# Altium PCB PCB.PcbDoc
Units mm, origin at the board's own origin, x right, y up, seen from the top; angles counter-clockwise.
Board outline 43.56 x 29.46 mm, 2 copper layers (Top Layer, Bottom Layer), stack 1.67 mm thick; 31 components, 26 nets, 139 pads, 0 vias.
Unrouted connection lines stored in the file: 86.
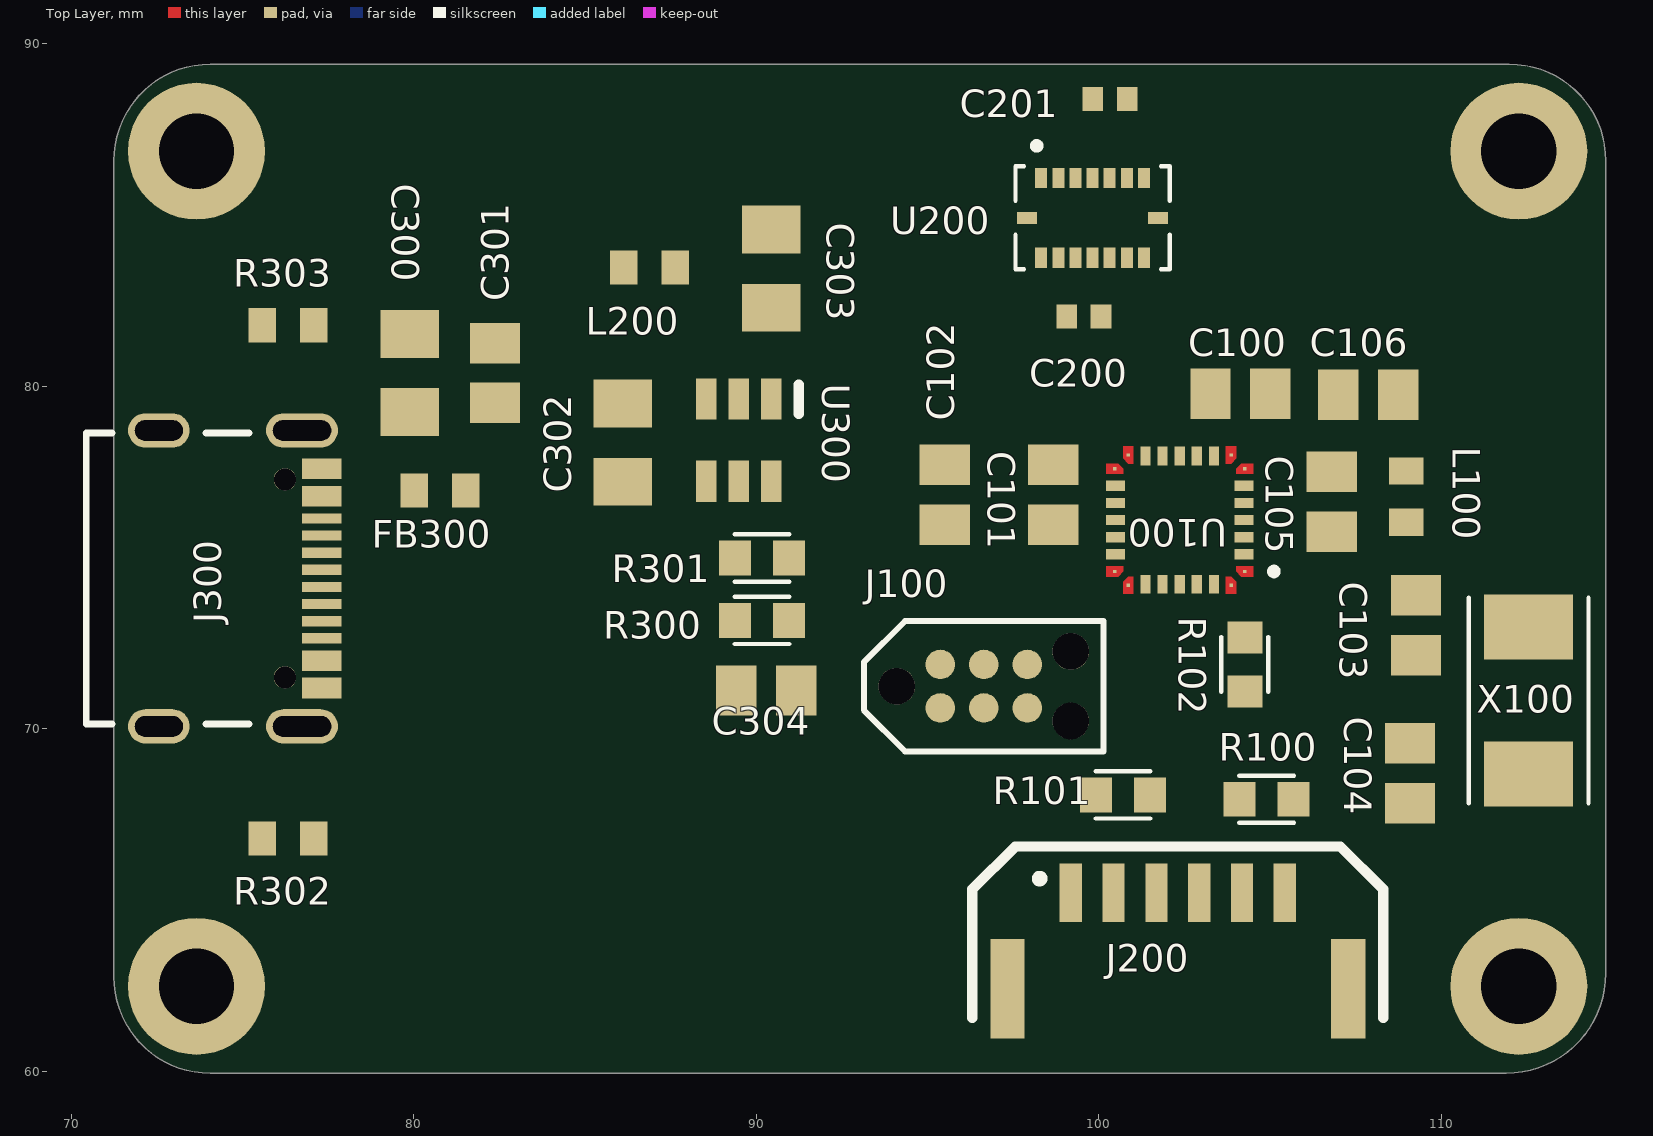
[diagram p0: Top Layer view]
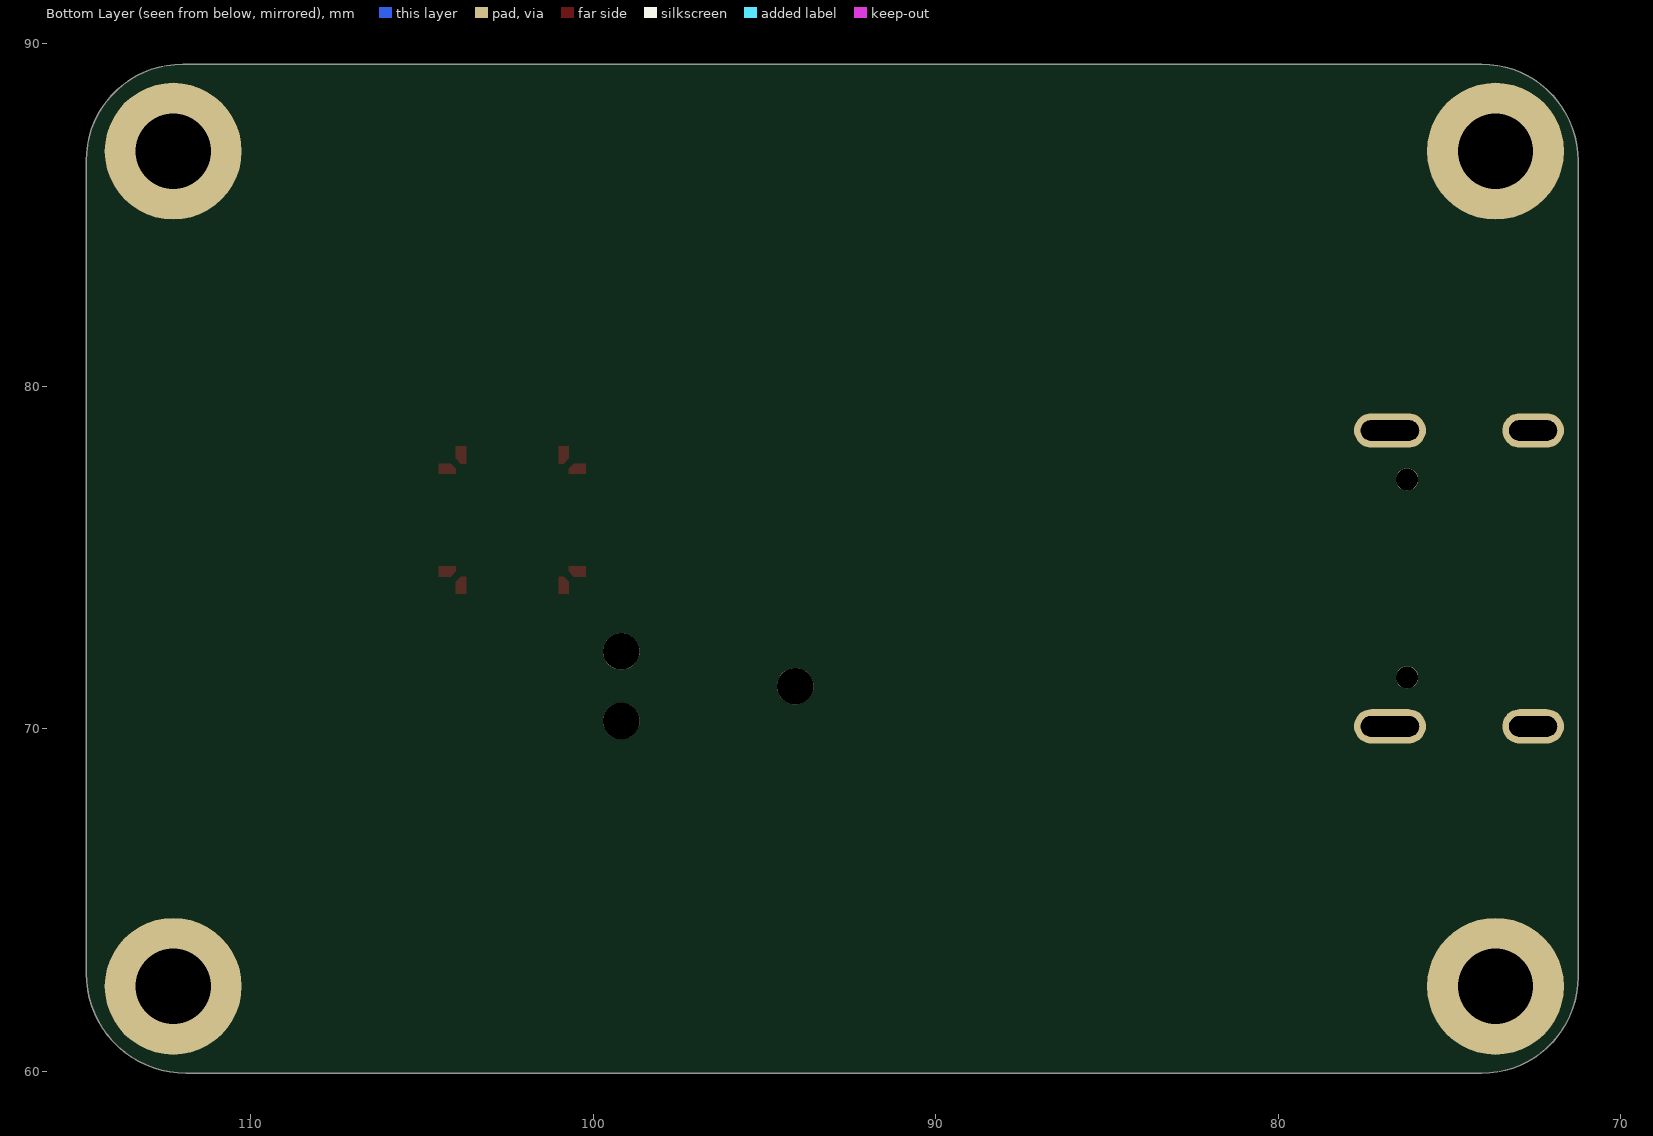
[diagram p1: Bottom Layer view, seen from below]

## Layer stack, top to bottom
Top Solder: solder mask 0.0254, Solder Resist, Dk 3.5
Top Layer: signal copper 0.035
Dielectric 1: dielectric 1.6, FR-4, Dk 4.6
Bottom Layer: signal copper 0.035
Bottom Solder: solder mask 0.0254, Solder Resist, Dk 3.5

## Board outline
71.247,62.759 ccw(c74.062,62.759) 74.062,59.944 111.894,59.944 ccw(c111.894,62.858) 114.808,62.858 114.808,86.593 ccw(c111.993,86.593) 111.993,89.408 74.062,89.408 ccw(c74.062,86.593) 71.247,86.593

## Design rules (kind name [scope] priority, off if disabled: settings)
Clearance [All] p1: gap=0.2 ignorepadtopadclearanceinfootprint=FALSE except(0: Arc-Hole Track-Hole SMDPad-Hole THPad-Hole Via-Hole Fill-Hole Poly-Hole Region-Hole Text-Hole; 0.15: Arc-Arc Arc-Track Arc-SMDPad Track-Track Track-SMDPad SMDPad-SMDPad; 0.3: Arc-THPad Track-THPad SMDPad-THPad THPad-THPad)
DiffPairsRouting [InDifferentialPairClass('USB')] p1: maxlimit=0.12 minlimit=0.12 mostfreqgap=0.12 toplayer_minwidth=0.351 toplayer_maxwidth=0.351 toplayer_prefwidth=0.351 bottomlayer_minwidth=0.351 bottomlayer_maxwidth=0.351 bottomlayer_prefwidth=0.351 impedanceprofiledriven=TRUE impedanceprofileid={9CCACE5A-470D-439F-A7A8-89F48AE89AC6} impedanceprofilevalue=90.000000 maxuncoupledlength=12.7
PolygonConnect [All] p1: thpad.connectstyle=Relief thpad.reliefconductorwidth=0.254 thpad.reliefentries=4 thpad.polygonreliefangle="90 Angle" thpad.airgapwidth=0.254 smdpad.connectstyle=Relief smdpad.reliefconductorwidth=0.254 smdpad.reliefentries=4 smdpad.polygonreliefangle="90 Angle" smdpad.airgapwidth=0.254 via.connectstyle=Direct via.reliefconductorwidth=0.254 via.reliefentries=4 via.polygonreliefangle="90 Angle" via.airgapwidth=0.254
RoutingVias [All] p1: holewidth=0.3 width=0.7 viastyle="Through Hole" minholewidth=0.25 minwidth=0.6 maxholewidth=0.3 maxwidth=0.7
SolderMaskExpansion [All] p1: expansion=0.102 istentingtop=FALSE
UnRoutedNet [All] p1: checkbadconnections=TRUE
Width [All] p1: maxlimit=1 minlimit=0.15 preferedwidth=0.254
28 further rules are at their usual default settings.

## Classes and differential pairs
differential pair class USB: USB_D
differential pair USB_D: +USB_D_P -USB_D_N

## Components (designator, comment, footprint, x,y, rotation, side; value= is the part's Value field where it differs from the comment)
C100 "100n" CAP-0805-NP0 104.14,79.784 r0 top
C101 "100n" CAP-0805-NP0 98.679,76.835 r90 top
C102 "100n" CAP-0805-NP0 95.504,76.835 r90 top
C103 "10p" CAP-0805-NP0 109.265,73.025 r270 top
C104 "10p" CAP-0805-NP0 109.093,68.707 r90 top
C105 "100n" CAP-0805-NP0 106.807,76.629 r270 top
C106 "100n" CAP-0805-NP0 107.87,79.756 r180 top
C200 "100n" CAP_0402 99.568,82.042 r180 top
C201 "100n" CAP_0402 100.33,88.392 r0 top
C300 "100n" CAP_0805 79.883,80.391 r90 top
C301 "4u7" CAP-0805-NP0 82.376,80.391 r270 top
C302 "100n" CAP_0805 86.106,78.359 r90 top
C303 "4u7" CAP_0805 90.444,83.439 r270 top
C304 "22p" CAP-0805-NP0 90.297,71.12 r0 top
FB300 "120R" FB_0603 80.772,76.962 r0 top
J100 "TC2030-NL" TC2030-NL-FP 96.647,71.247 r0 top
J200 "SM06B-GHS-TB" SM06B_GHS_TB 102.312,63.815 r0 top
J300 "USB4105-GF-A-060" USB4105-GF-A-060 74.75,75.184 r270 top
L100 "Inductor" IND_0603 108.89,76.632 r270 top
L200 "Inductor" IND_0603 86.741,83.566 r180 top
R100 "5k1" RES-0603 104.902,67.945 r0 top
R101 "5k1" RES-0603 100.711,68.072 r180 top
R102 "5k1" RES-0603 104.267,71.882 r90 top
R300 "887k" RES-0603 90.17,73.167 r0 top
R301 "280k" RES-0603 90.17,74.992 r180 top
R302 "5k1" RES_0603 76.327,66.802 r180 top
R303 "5k1" RES_0603 76.327,81.788 r180 top
U100 "STM32F042G6U6" STM32F042G6U6 102.366,76.096 r180 top
U200 "BMI088" BMI088 99.822,84.923 r0 top
U300 "LTC" SOT-23-6 89.491,78.431 r180 top
X100 "24MHZ" ABM7-8MHZ 112.442,70.866 r270 top

## Footprints (in the part's own frame and the unit in brackets; to place one, negate y for a bottom-side part, rotate by r counter-clockwise, add the part's x,y. Pads: shape width x height; smd on the part's side, far side on the other; paste and mask are expansions set on the pad)
ABM7-8MHZ [mm]
  rect 1.9x2.6 smd: 1(-2.114,0.111) 2(2.186,0.111)
  silkscreen extent -2.96,-1.64 3.04,1.86, body extent -2.95,-1.65 3.05,1.85, height 1.4
BMI088 [mm]
  rect 0.35x0.59 smd mask+0.05: 1(-1.5,1.165) 2(-1,1.165) 3(-0.5,1.165) 4(0,1.165) 5(0.5,1.165) 6(1,1.165) 7(1.5,1.165) 9(1.5,-1.165) 10(1,-1.165) 11(0.5,-1.165) 12(0,-1.165) 13(-0.5,-1.165) 14(-1,-1.165) 15(-1.5,-1.165)
  rect 0.59x0.35 smd mask+0.05: 8(1.915,0) 16(-1.915,0)
  silkscreen extent -2.25,-1.5 2.25,2.2, body extent -2.25,-1.5 2.25,1.5, height 1
CAP-0805-NP0 [mm]
  rect 1.18x1.47 smd mask+0.001: 1(-0.874,0) 2(0.874,0)
  body extent -1,-0.63 1,0.63, height 1.15
CAP_0402 [mm]
  rect 0.6x0.7 smd: 1(0.5,0) 2(-0.5,0)
  body extent -0.5,-0.26 0.5,0.27, height 0
CAP_0805 [mm]
  rect 1.4x1.7 smd: 1(1.143,0) 2(-1.143,0)
  body extent -1.15,-0.76 1.15,0.79, height 0.98
FB_0603 [mm]
  rect 0.8x1 smd: 1(-0.75,0) 2(0.75,0)
  body extent -0.8,-0.4 0.8,0.4, height 0.81
IND_0603 [mm]
  rect 0.8x1 smd: 1(-0.897,0.092) 2(0.603,0.092)
  body extent -0.96,-0.27 0.66,0.46, height 0.87
RES-0603 [mm]
  rect 0.94x1.02 smd mask+0.001: 1(-0.79,0) 2(0.79,0)
  silkscreen extent -0.8,-0.69 0.8,0.69, body extent -0.99,-0.48 0.99,0.5, height 0.44
RES_0603 [mm]
  rect 0.8x1 smd: 1(-0.75,0) 2(0.75,0)
  body extent -0.8,-0.43 0.8,0.43, height 0.52
SM06B_GHS_TB [mm]
  rect 0.65x1.7 smd: 1(-3.125,1.4) 2(-1.875,1.4) 3(-0.625,1.4) 4(0.625,1.4) 5(1.875,1.4) 6(3.125,1.4)
  rect 1x2.9 smd: ""(-4.975,-1.4) ""(4.975,-1.4)
  silkscreen extent -6,-2.25 6,2.75, body extent -5.38,-2.8 5.38,2.05, height 4.26
SOT-23-6 [mm]
  rect 0.6x1.2 smd: 1(-0.95,-1.2) 2(0,-1.2) 3(0.95,-1.2) 4(0.95,1.2) 5(0,1.2) 6(-0.95,1.2)
  silkscreen extent -1.75,-1.63 -1.75,-0.76, body extent -1.45,-1.4 1.45,1.4, height 1.45
STM32F042G6U6 [mm]
  rect 0.1x0.1 smd paste-1 mask+0.102: 1(-1.9,1.5) 7(-1.9,-1.5) 8(-1.5,-1.9) 14(1.5,-1.9) 15(1.9,-1.5) 21(1.9,1.5) 22(1.5,1.9) 28(-1.5,1.9)
  rect 0.55x0.3 smd paste+0 mask+0.05: 2(-1.875,1) 3(-1.875,0.5) 4(-1.875,0) 5(-1.875,-0.5) 6(-1.875,-1) 16(1.875,-1) 17(1.875,-0.5) 18(1.875,0) 19(1.875,0.5) 20(1.875,1)
  rect 0.3x0.55 smd paste+0 mask+0.05: 9(-1,-1.875) 10(-0.5,-1.875) 11(0,-1.875) 12(0.5,-1.875) 13(1,-1.875) 23(1,1.875) 24(0.5,1.875) 25(0,1.875) 26(-0.5,1.875) 27(-1,1.875)
  Top Layer region: -1.35,1.65 -1.5,1.65 -1.65,1.8 -1.65,2.15 -1.35,2.15
  Top Layer region: 1.65,1.8 1.5,1.65 1.35,1.65 1.35,2.15 1.65,2.15
  Top Layer region: 2.15,1.35 1.65,1.35 1.65,1.5 1.8,1.65 2.15,1.65
  Top Layer region: 2.15,-1.65 1.8,-1.65 1.65,-1.5 1.65,-1.35 2.15,-1.35
  Top Layer region: 1.65,-1.8 1.65,-2.15 1.35,-2.15 1.35,-1.65 1.5,-1.65
  Top Layer region: -1.35,-2.15 -1.65,-2.15 -1.65,-1.8 -1.5,-1.65 -1.35,-1.65
  Top Layer region: -1.65,-1.5 -1.8,-1.65 -2.15,-1.65 -2.15,-1.35 -1.65,-1.35
  Top Layer region: -1.65,1.5 -1.65,1.35 -2.15,1.35 -2.15,1.65 -1.8,1.65
  silkscreen extent -2.85,1.4 -2.65,1.6, body extent -2.01,-2.01 1.99,1.99, height 0.6
TC2030-NL-FP [mil]
  round 33.98 smd: 1(-50,-25) 2(-50,25) 3(0,-25) 4(0,25) 5(50,-25) 6(50,25)
  round 42.01 hole 42.01 unplated: MH(-100,0) MH(100,-40) MH(100,40)
  silkscreen extent -138,-75 138,75
USB4105-GF-A-060 [mm]
  rect 0.6x1.15 smd mask+0.05: A1,B12(-2.41,2.566) A4,B9(-1.61,2.566) B1,A12(3.99,2.566) B4,A9(3.19,2.566)
  rect 0.3x1.15 smd mask+0.05: A5(-0.46,2.566) A6(0.54,2.566) A7(1.04,2.566) A8(2.04,2.566) B5(2.54,2.566) B6(1.54,2.566) B7(0.04,2.566) B8(-0.96,2.566)
  round 0.65 hole 0.65 unplated mask+0.05: MH(-2.1,1.491) MH(3.68,1.491)
  oval 1x2.1 hole 0.6 slot 1.7 at 90 deg: SH(-3.53,1.991) SH(5.11,1.991)
  oval 1x1.8 hole 0.6 slot 1.4 at 90 deg: SH(-3.53,-2.189) SH(5.11,-2.189)
  silkscreen extent -3.46,-4.31 5.04,0.44, body extent -3.68,-4.78 5.26,2.92, height 3.27

## Part data
C100 C101 C102 C103 C104 C105 C106: library part CAP-0805-NP0-27pF, "Surface Mount Ceramic Multilayer Capacitor 27pF 1% C0G 50V 0805 Paper T/R", Capacitance=27pF, Case Code (Metric)=2012, Case Code (Imperial)=0805, Dielectric=C0G, Manufacturer=Yageo, Manufacturer Part Number=CC0805FRNPO9BN270, Max Operating Temperature=125°C, Min Operating Temperature=-55°C, Resistor Type=Ceramic, Supplier Part Number 1=311-4173-1-ND, Tolerance=1%, Voltage Rating=50V, Case/Package=0805, Category="Ceramic Capacitors", ComponentLink1Description=https://datasheet.ciiva.com/11465/upy-gp-np0-16v-to-50v-8-11465135.pdf?src-supplier=Avnet, ComponentLink1URL=https://datasheet.ciiva.com/11465/upy-gp-np0-16v-to-50v-8-11465135.pdf?src-supplier=Avnet, ComponentLink2Description=https://datasheet.ciiva.com/17436/upy-gp-np0-16v-to-50v-8-17436811.pdf?src-supplier=Avnet+Europe, ComponentLink2URL=https://datasheet.ciiva.com/17436/upy-gp-np0-16v-to-50v-8-17436811.pdf?src-supplier=Avnet+Europe, Depth=1.25mm, Height=0.6mm, Lead Free="Lead Free", Length=2mm, Mount="Surface Mount", Packaging="Tape and Reel", Pricing 1="1=0,30000, 10=0,20400, 50=0,12260, 100=0,10350, 500=0,07082, 1000=0,06264 (USD)", RoHS=Yes, RoHS Compliant=Yes, Series=CC, Stock 1=10598, Supplier 1=Digi-Key, Termination=SMD/SMT, Thickness=0.028inch, Voltage Rating (DC)=50V, Weight=0.000194oz, Width=0.049inch
C200 C201: library part CAP_0402_16V, "Capacitor SMD 0402 16V"
C300 C301 C302 C303 C304: library part CAP_0805_16V, "Capacitor SMD 0805 16V"
FB300: library part FB_0603, "Ferrite Bead SMD 0603"
J200: "Header Connector 6 Position 1.25MM Pitch SMD Horizontal JST GH", Manufacturer=JST, Manufacturer Part Number=SM06B-GHS-TB
J300: "USB Connector Type C SMT 12 Pin", Manufacturer=GCT, Manufacturer Part Number=USB4105-GF-A-060
R100 R101 R102 R300 R301: library part RES-0603-1k, "贴片电阻 1000Ω ± 1.00% 0.1W ± 100ppm/℃ 0603", Case Code (Metric)=1608, Case Code (Imperial)=0603, Manufacturer="Vishay Dale", Manufacturer Part Number=CRCW06031K00FKEA, Max Operating Temperature=155°C, Max Power Dissipation=100mW, Min Operating Temperature=-55°C, Package Quantity=10, Resistance=1kR, Resistance Tolerance=1%, Resistor Type="Thick Film", Supplier Part Number 1=61M5328, Temperature Coefficient=100ppm/°C, Voltage Rating=75V, Case/Package=0603, Category="Chip SMD Resistors", ComponentLink1Description=https://datasheet.ciiva.com/11808/0900766b80d98afc-11808625.pdf?src-supplier=RSComponents, ComponentLink1URL=https://datasheet.ciiva.com/11808/0900766b80d98afc-11808625.pdf?src-supplier=RSComponents, ComponentLink2Description=https://datasheet.ciiva.com/46441/1720486-46441623.pdf?src-supplier=Element14, ComponentLink2URL=https://datasheet.ciiva.com/46441/1720486-46441623.pdf?src-supplier=Element14, ComponentLink3Description=https://datasheet.ciiva.com/46441/1720486-46441622.pdf?src-supplier=Element14, ComponentLink3URL=https://datasheet.ciiva.com/46441/1720486-46441622.pdf?src-supplier=Element14, ComponentLink4Description=https://datasheet.ciiva.com/26316/fld-crcw-e3-data-en-26316551.pdf?src-supplier=Distrelec, ComponentLink4URL=https://datasheet.ciiva.com/26316/fld-crcw-e3-data-en-26316551.pdf?src-supplier=Distrelec, ComponentLink5Description=https://datasheet.ciiva.com/46385/1697337-46385497.pdf?src-supplier=Element14, ComponentLink5URL=https://datasheet.ciiva.com/46385/1697337-46385497.pdf?src-supplier=Element14, ComponentLink6Description=https://datasheet.ciiva.com/2465/dcrcwe3-2465535.pdf?src-supplier=Digi-Key, ComponentLink6URL=https://datasheet.ciiva.com/2465/dcrcwe3-2465535.pdf?src-supplier=Digi-Key, ComponentLink7Description=https://datasheet.ciiva.com/2465/dcrcwe3-2465536.pdf?src-supplier=Digi-Key, ComponentLink7URL=https://datasheet.ciiva.com/2465/dcrcwe3-2465536.pdf?src-supplier=Digi-Key, ComponentLink8Description=https://datasheet.ciiva.com/2465/dcrcwe3-2465534.pdf?src-supplier=Digi-Key, ComponentLink8URL=https://datasheet.ciiva.com/2465/dcrcwe3-2465534.pdf?src-supplier=Digi-Key, ComponentLink9Description=https://datasheet.ciiva.com/16515/dcrcwe3-16515078.pdf?src-supplier=Avnet+Asia, ComponentLink9URL=https://datasheet.ciiva.com/16515/dcrcwe3-16515078.pdf?src-supplier=Avnet+Asia, ComponentLink10Description=https://datasheet.ciiva.com/8336/dcrcwe3-8336822.pdf?src-supplier=Avnet, ComponentLink10URL=https://datasheet.ciiva.com/8336/dcrcwe3-8336822.pdf?src-supplier=Avnet, ComponentLink11Description=https://datasheet.ciiva.com/16199/dcrcwe3-16199053.pdf?src-supplier=Future+Electronics, ComponentLink11URL=https://datasheet.ciiva.com/16199/dcrcwe3-16199053.pdf?src-supplier=Future+Electronics, ComponentLink12Description=https://datasheet.ciiva.com/16893/dcrcwe3-16893742.pdf?src-supplier=Avnet+Europe, ComponentLink12URL=https://datasheet.ciiva.com/16893/dcrcwe3-16893742.pdf?src-supplier=Avnet+Europe, ComponentLink13Description=https://datasheet.ciiva.com/3257/dcrcwe3-3257132.pdf?src-supplier=Avnet, ComponentLink13URL=https://datasheet.ciiva.com/3257/dcrcwe3-3257132.pdf?src-supplier=Avnet, Construction=Rectangular, Contact Plating=Tin, Depth=0.85mm, Features="Automotive AEC-Q200", Height=0.45mm, Lead Free="Lead Free", Length=1.55mm, Military Standard=Not, Mount="Surface Mount", Number of Pins=2, Number of Terminations=2, Packaging="Tape and Reel", Power Rating=100mW, Pricing 1="1=0,12500, 10=0,05300, 25=0,04300, 50=0,03100, 100=0,02100 (USD)", Radiation Hardening=No, REACH SVHC=Unknown, RoHS=Yes, RoHS Compliant=Yes, Series=CRCW, Size Code=0603, Supplier 1=Newark, Technology="THICK FILM", Termination=SMD/SMT, Tolerance=1%, Voltage Rating (DC)=75V, Weight=7.1E-05oz, Width=0.033inch
R302 R303: library part RES_0603, "Resistor SMD 0603"
U100: "MCU 32-Bit STM32F ARM Cortex M0 RISC 32KB Flash 2.5V/3.3V 28-Pin UFQFPN Tray", Case/Package=UFQFPN, Frequency=48MHz, Manufacturer=STMicroelectronics, Max Operating Temperature=85°C, Max Power Dissipation=170mW, Max Supply Voltage=3.6V, Min Operating Temperature=-40°C, Min Supply Voltage=2V, Package Quantity=2940, Supplier Part Number 1=2469551, Category=Microcontrollers, ComponentLink1Description=https://datasheet.ciiva.com/48494/dm00105814-48494126.pdf?src-supplier=Avnet, ComponentLink1URL=https://datasheet.ciiva.com/48494/dm00105814-48494126.pdf?src-supplier=Avnet, Core Architecture=ARM, Data Bus Width=32b, Lead Free="Lead Free", Manufacturer Part Number=STM32F042G6U6, Max Frequency=48MHz, Memory Size=32KB, Memory Type=FLASH, Mount="Surface Mount", Number of ADC Channels=13, Number of Pins=28, Number of Programmable I/O=24, Number of Timers/Counters=6, Number of I/Os=24, Oscillator Type=Internal, Packaging=Tray, Peripherals=POR,PWM,WDT,DMA, Pricing 1="1=4,49000, 10=4,05000, 25=3,82000, 50=3,74000 (EUR)", Radiation Hardening=No, RAM Size=6KB, REACH SVHC="No SVHC", RoHS=Yes, RoHS Compliant=Yes, Supplier 1=Farnell, Watchdog Timer=Yes, Interface=I2C,SPI,USB,CAN,HDMI,IrDA,UART,USART,LIN,I2S
U300: library part LTC3405, "1.5MHz, 300mA Synchronous Step-Down Regulator in ThinSOT", Manufacturer="Analog Devices", Manufacturer Part Number=LTC3405ES6#TRMPBF
X100: library part ABM7-8MHZ, "Crystal 8MHz ±20ppm (Tol) ±30ppm (Stability) 18pF FUND 100Ohm 2-Pin Mini-CSMD T/R", Case/Package=CSMD, ESR (Equivalent Series Resistance)=100R, Frequency=8MHz, Frequency Stability=30ppm, Frequency Tolerance=20ppm, Load Capacitance=18pF, Manufacturer=Abracon, Manufacturer Part Number=ABM7-8.000MHZ-D2Y-T, Max Operating Temperature=85°C, Min Operating Temperature=-40°C, Package Quantity=1000, Resistor Type=Ceramic, Series Resistance=80R, Supplier Part Number 1=535-9831-6-ND, Category=Crystals, ComponentLink1Description=https://datasheet.ciiva.com/15116/getdatasheetpartid-722403-15116844.pdf?src-supplier=Verical, ComponentLink1URL=https://datasheet.ciiva.com/15116/getdatasheetpartid-722403-15116844.pdf?src-supplier=Verical, ComponentLink2Description=https://datasheet.ciiva.com/1357/1718755-1357277.pdf?src-supplier=Element14, ComponentLink2URL=https://datasheet.ciiva.com/1357/1718755-1357277.pdf?src-supplier=Element14, ComponentLink3Description=https://datasheet.ciiva.com/4944/abm7-19096-4944987.pdf?src-supplier=Mouser, ComponentLink3URL=https://datasheet.ciiva.com/4944/abm7-19096-4944987.pdf?src-supplier=Mouser, ComponentLink4Description=https://datasheet.ciiva.com/29998/abm7-29998171.pdf?src-supplier=Avnet, ComponentLink4URL=https://datasheet.ciiva.com/29998/abm7-29998171.pdf?src-supplier=Avnet, ComponentLink5Description=https://datasheet.ciiva.com/16416/abm7-16416924.pdf?src-supplier=Future+Electronics, ComponentLink5URL=https://datasheet.ciiva.com/16416/abm7-16416924.pdf?src-supplier=Future+Electronics, Depth=3.5mm, Height=0.055inch, Lead Free="Lead Free", Length=6mm, Mount="Surface Mount", Number of Pins=2, Packaging="Tape and Reel", Pricing 1="1=0,87000, 10=0,77300, 50=0,72240, 100=0,63840, 500=0,60480 (USD)", Radiation Hardening=No, REACH SVHC=Yes, RoHS=Yes, Supplier 1=Digi-Key, Termination=SMD/SMT, Tolerance=20ppm, Width=0.138inch

## Free pads (board coordinates)
  round 4 hole 2.2: MH(73.66,62.484) MH(73.66,86.868) MH(112.268,62.484) MH(112.268,86.868)

## Nets (pads, with @x,y where several pads share a name; then routed paths per layer and width w, separated by ;. In a path a pad name is that pad's centre, name@x,y a point inside that pad or via, vN(x,y) a via of type N, cw(c..) or ccw(c..) an arc to the next point about the centre after c; other vN are vias at no path point)
+3V3: C101.1 C102.1 C105.1 C200.2 C201.2 C301.2 C304.2 J100.1 J200.1 L100.1 L200.2 R100.2 R101.2 R300.2 U100.17 U100.18 U200.3 U200.11
+3V3A: C106.1 L100.2 U100.5
+5V: C302.2 C303.2 FB300.2 U300.1 U300.4
+VUSB: C300.2 FB300.1
BOOT0: R102.2 U100.1
BUCK_SW: L200.1 U300.3
BUCK_VFB: C304.1 R300.1 R301.2 U300.5
GND: C100.2 C101.2 C102.2 C103.2 C104.2 C105.2 C106.2 C200.1 C201.1 C300.1 C301.1 C302.1 C303.1 J100.5 J200.2 J200.4 J200.6 pad.MH R102.1 R301.1 R302.1 R303.1 U100.16 U200.2 U200.4 U200.6 U200.7 U300.2 U300.6
I2C_SCL: J200.3 R101.1 U100.27
I2C_SDA: J200.5 R100.1 U100.28
IMU_INT1: U100.15 U200.16
IMU_INT2: U100.14 U200.12
IMU_MISO: U100.12 U200.10 U200.15
IMU_MOSI: U100.13 U200.9
IMU_NCS_ACC: U100.8 U200.14
IMU_NCS_GYR: U100.9 U200.5
IMU_SCK: U100.11 U200.8
NRST: C100.1 J100.3 U100.4
OSC_IN: C103.1 U100.2 X100.1
OSC_OUT: C104.1 U100.3 X100.2
SWCLK: J100.4 U100.22
SWDIO: J100.2 U100.21
USB_CC1: J300.A5 R303.2
USB_CC2: J300.B5 R302.2
USB_D_N: J300.A7 J300.B7 U100.19
USB_D_P: J300.A6 J300.B6 U100.20
pads on no net: J100.6 J100.MH J200. J300.A1,B12 J300.A4,B9 J300.A8 J300.B1,A12 J300.B4,A9 J300.B8 J300.MH J300.SH U100.6 U100.7 U100.10 U100.23 U100.24 U100.25 U100.26 U200.1 U200.13

## Silkscreen, mask and mechanical layers (free items; w line width, h text height)
Mechanical 1:
  the board outline again, w0.2